# Altium PCB TDA7000.PcbDoc
Units mm, origin at the board's own origin, x right, y up, seen from the top; angles counter-clockwise.
Board outline 50 x 50.6 mm, 2 copper layers (Top Layer, Bottom Layer); 28 components, 21 nets, 79 pads, 4 vias.
Unrouted connection lines stored in the file: 11.
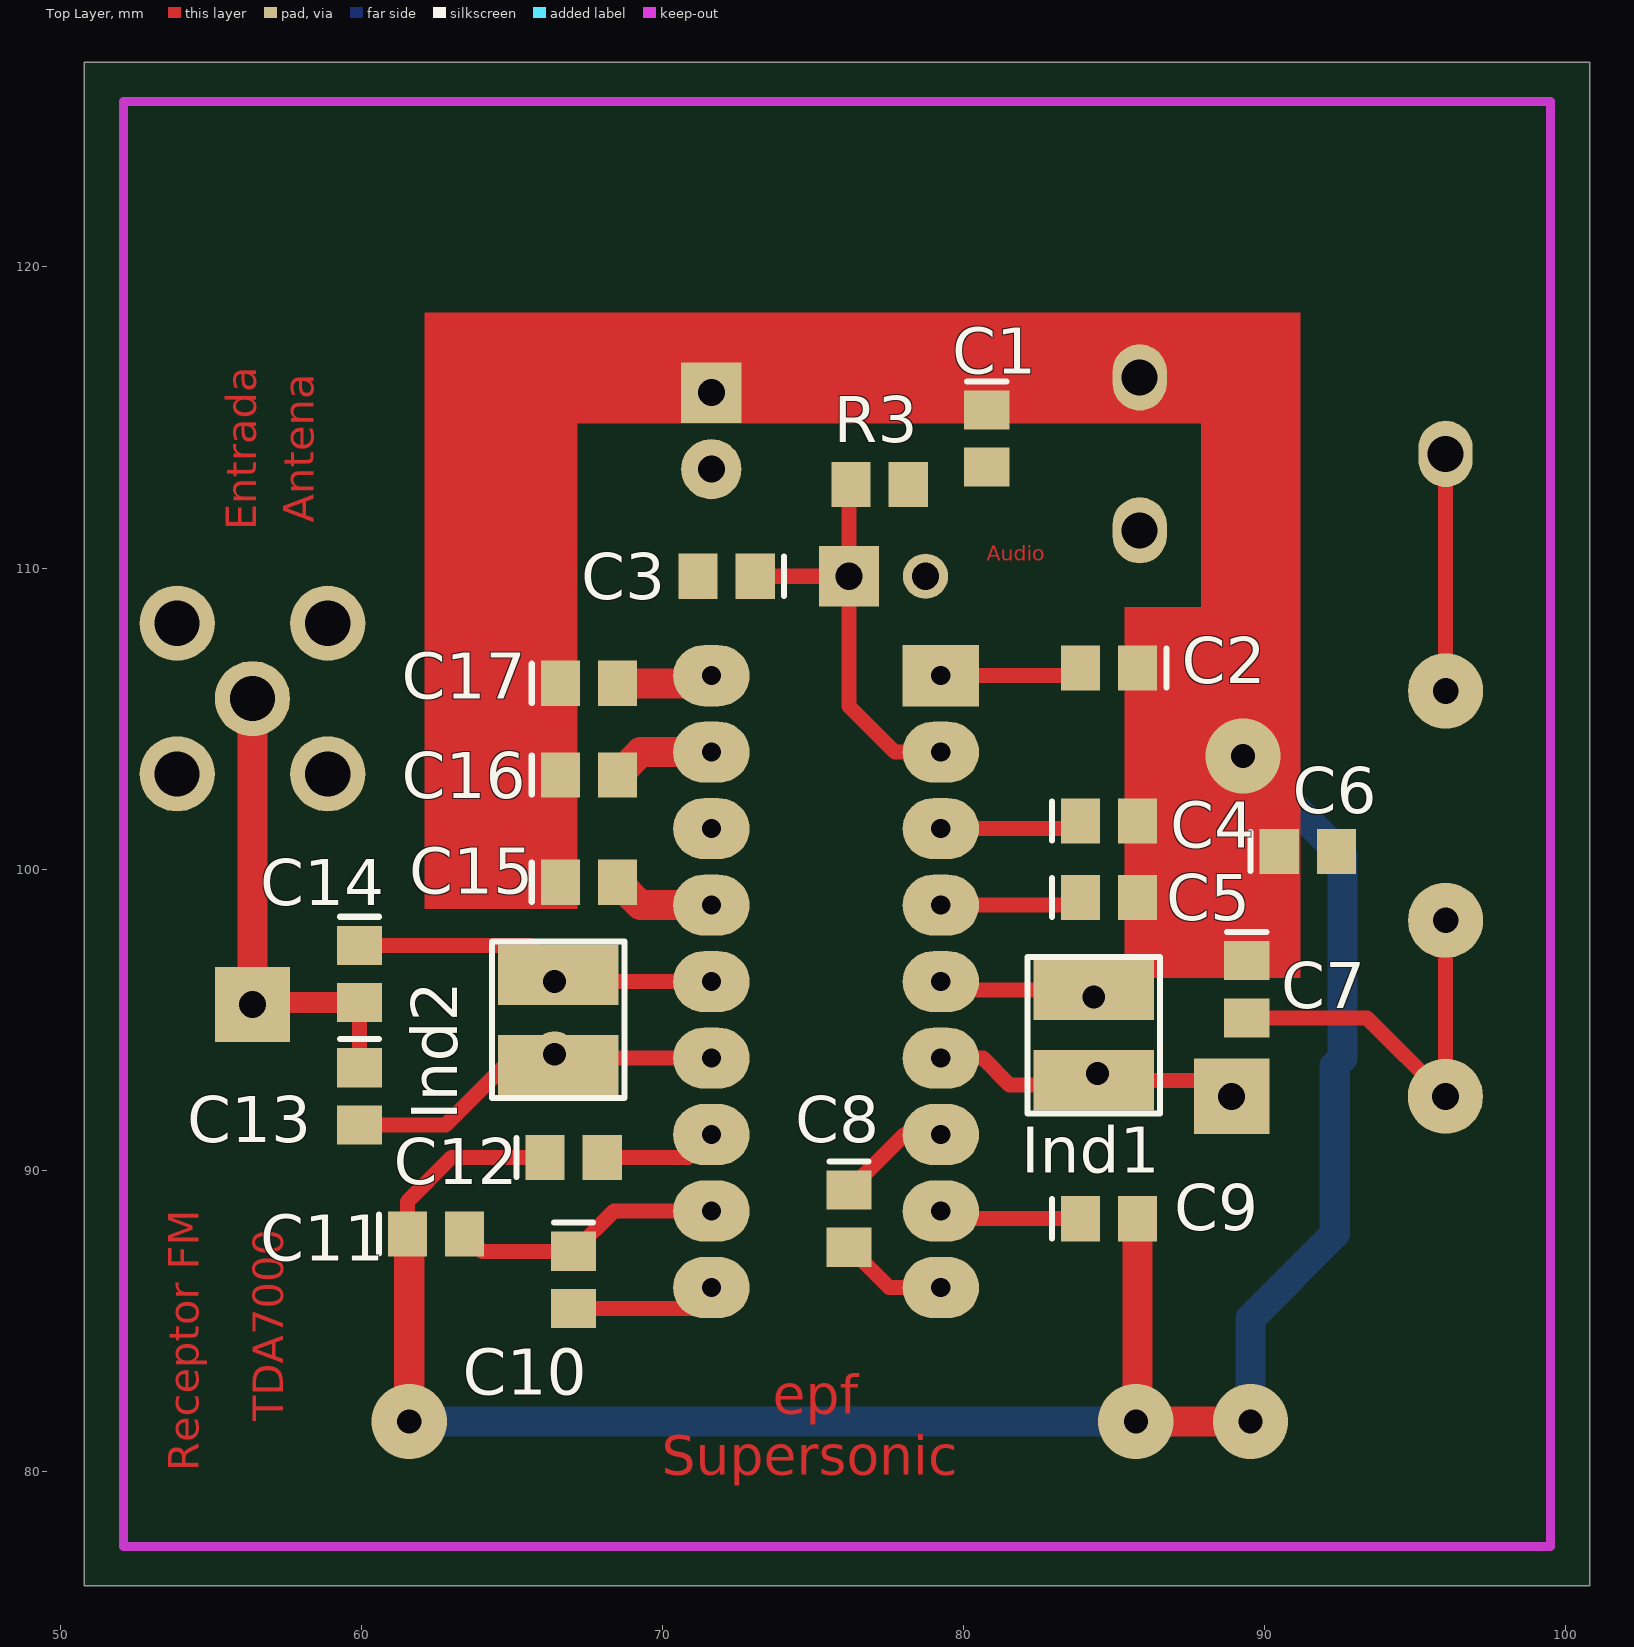
[diagram p0: Top Layer view]
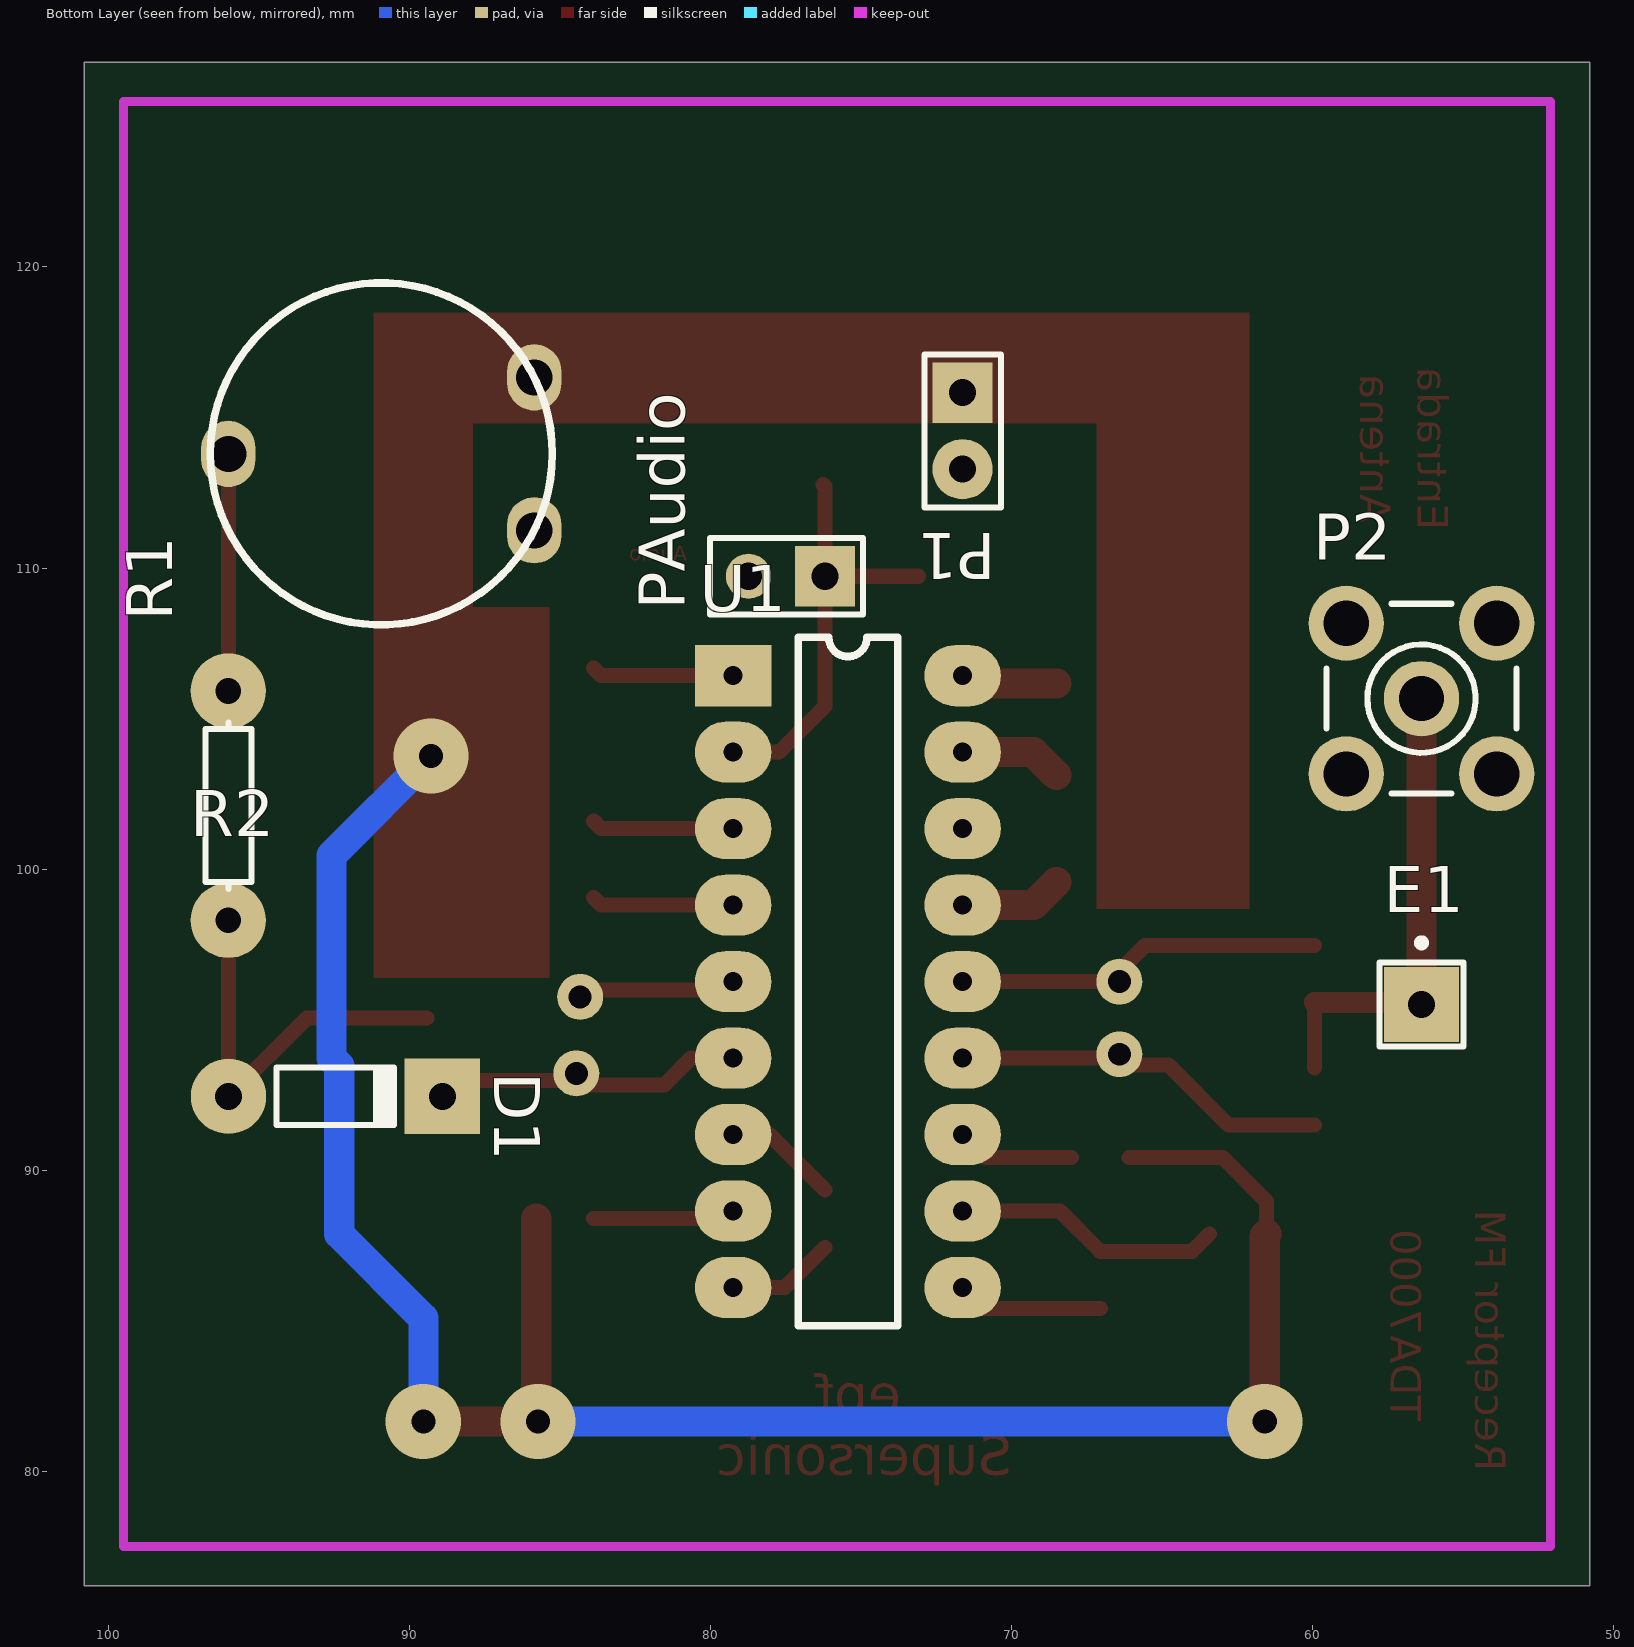
[diagram p1: Bottom Layer view, seen from below]

## Layer stack, top to bottom
Top Layer: signal copper 0.0356
Dielectric: dielectric 0.32, FR-4, Dk 4.8
Bottom Layer: signal copper 0.0356

## Board outline
50.8,76.2 100.8,76.2 100.8,126.8 50.8,126.8

## Design rules (kind name [scope] priority, off if disabled: settings)
Clearance [All] p1: gap=0.3
ComponentClearance [All] p1: gap=0.254 collisioncheckmode=3 verticalgap=0.254
PolygonConnect [All] p1: connectstyle=Direct reliefconductorwidth=0.254 reliefentries=4 polygonreliefangle="90 Angle"
RoomDefinition TDA7000 [InComponentClass('TDA7000')] p1: confinementstyle=ConfineIn formatcopy=TRUE lockcomponents=TRUE outline 45.339,73.406 104.013,73.406 104.013,127.635 45.339,127.635
RoutingVias [All] p1: holewidth=0.8 width=2 viastyle="Through Hole" minholewidth=0.711 minwidth=1.5 maxholewidth=1 maxwidth=3
SolderMaskExpansion [All] p1: expansion=0.102
TestPointUsage [All] p1: valid=0 allowmultiple=FALSE
Testpoint [All] p1: side=15 testpointundercomponent=TRUE minsize=1.016 maxsize=2.54 preferedsize=1.524 minholesize=0 maxholesize=1.016 preferedholesize=0.813 testpointgrid=0.025 style=1023 order=0-112345678
Width [All] p1: maxlimit=3 minlimit=0.3 preferedwidth=0.3
18 further rules are at their usual default settings.

## Components (designator, comment, footprint, x,y, rotation, side; value= is the part's Value field where it differs from the comment)
C1 "Cap Pol3" C0805 80.772,114.3 r270 top
C2 "Cap Pol3" C0805 84.836,106.68 r180 top
C3 "Cap Pol3" C0805 72.136,109.728 r180 top
C4 "Cap Pol3" C0805 84.836,101.6 r0 top
C5 "Cap Pol3" C0805 84.836,99.06 r0 top
C6 "Cap Pol3" C0805 91.44,100.584 r0 top
C7 "Cap Pol3" C0805 89.408,96.012 r270 top
C8 "Cap Pol3" C0805 76.2,88.392 r270 top
C9 "Cap Pol3" C0805 84.836,88.392 r0 top
C10 "Cap Pol3" C0805 67.056,86.36 r270 top
C11 "Cap Pol3" C0805 62.484,87.884 r0 top
C12 "Cap Pol3" C0805 67.056,90.424 r0 top
C13 "Cap Pol3" C0805 59.944,92.456 r270 top
C14 "Cap Pol3" C0805 59.944,96.52 r270 top
C15 "Cap Pol3" C0805 67.564,99.568 r0 top
C16 "Cap Pol3" C0805 67.564,103.124 r0 top
C17 "Cap Pol3" C0805 67.564,106.172 r0 top
D1 "Diode 1N914" DO-35 92.456,92.456 r180 bottom
E1 "Antenna" PIN1 56.388,95.504 r180 bottom
Ind1 "Ind2" IND_3MM 84.328,94.488 r90 top
Ind2 "Ind2" IND_3MM 66.548,94.996 r90 top
P1 "Header 2" HDR1X2#1 71.628,115.824 r270 bottom
P2 "SMB" SMB_V-RJ45 56.388,105.664 r180 bottom
PAudio "Header 2" HDR1X2#2 76.2,109.728 r0 bottom
R1 "Pot" POTENCIOMETRO 85.852,113.792 r90 bottom
R2 "Res1" AXIAL-0.3 96.012,102.108 r270 bottom
R3 "Res Semi" 2012[0805] 77.216,112.776 r180 top
U1 "TDA7000" TDA7000 79.248,106.426 r180 bottom

## Footprints (in the part's own frame and the unit in brackets; to place one, negate y for a bottom-side part, rotate by r counter-clockwise, add the part's x,y. Pads: shape width x height; smd on the part's side, far side on the other; paste and mask are expansions set on the pad)
2012[0805] [mm] "Chip Resistor; Body 2.0 x 1.3 mm (LxW typ)"
  rect 1.3x1.5 smd: 1(-0.95,0) 2(0.95,0)
AXIAL-0.3 [mm] "Resistor; 2 Leads"
  round 2.5 hole 0.85: 1(-3.81,0) 2(3.81,0)
  silkscreen extent -2.77,-0.76 2.77,0.76
C0805 [mm] "Chip Capacitor; Body 2.0 x 1.2 mm (LxW typ)"
  rect 1.3x1.5 smd: 1(-0.95,0) 2(0.95,0)
  silkscreen extent -1.9,-0.65 -1.9,0.65
DO-35 [mm] "Diode, Axial; Body 3.8 x 1.9 mm (LxDia. max), Lead Dia. 0.53 mm (max)"
  round 2.5 hole 0.9: 1(-3.55,0)
  rect 2.5x2.5 hole 0.9: 2(3.55,0)
  silkscreen extent -1.95,-0.95 2.05,0.95
HDR1X2#1 [mm] "Connector; Header; 2 Position"
  rect 2x2 hole 0.9: 1(0,0)
  round 2 hole 0.9: 2(2.54,0)
  silkscreen extent -1.27,-1.27 3.81,1.27
HDR1X2#2 [mm] "Connector; Header; 2 Position"
  rect 2x2 hole 0.9: 1(0,0)
  round 1.5 hole 0.9: 2(2.54,0)
  silkscreen extent -1.27,-1.27 3.81,1.27
IND_3MM [mm]
  rect 2x4 smd: 1(-1.5,0) 2(1.5,0)
  silkscreen extent -2.6,-2.2 2.6,2.2
PIN1 [mm] "Generic Antenna; 1 Lead"
  rect 2.5x2.5 hole 0.9: 1(0,0)
  silkscreen extent -1.4,-1.4 1.4,2.17
POTENCIOMETRO [mm]
  oval 2.2x1.8 hole 1.2: 1(-2.54,0) 2(2.54,0) 3(0,10.16)
  silkscreen extent -5.68,-0.6 5.68,10.76
SMB_V-RJ45 [mm] "Connector; SMB Straight"
  round 2.5 hole 1.5: 1(0,0) 2(-2.5,-2.5) 2(-2.5,2.5) 2(2.5,-2.5) 2(2.5,2.5)
  silkscreen extent -3.15,-3.15 3.15,3.15
TDA7000 [mil]
  rect 100x80 hole 25: 1(0,0)
  oval 100x80 hole 25: 2(0,-100) 3(0,-200) 4(0,-300) 5(0,-400) 6(0,-500) 7(0,-600) 8(0,-700) 9(0,-800) 10(300,-800) 11(300,-700) 12(300,-600) 13(300,-500) 14(300,-400) 15(300,-300) 16(300,-200) 17(300,-100) 18(300,0)
  silkscreen extent 85,-850 215,50

## Part data
C1 C2 C3 C4 C5 C6 C7 C8 C9 C10 C11 C12 C13 C14 C15 C16 C17: "Polarized Capacitor (Surface Mount)"
D1: "High Conductance Fast Diode"
E1: "Generic Antenna"
P1 PAudio: "Header, 2-Pin"
P2: "SMB Straight Connector"
R2: "Resistor"
R3: "Semiconductor Resistor"

## Free pads (board coordinates)
  round 1.524 hole 0.762: 0(66.421,96.266) 1(66.421,93.853) 2(84.328,95.758) 3(84.455,93.218)

## Via types
v1: diameter 2.5, hole 0.8, Top Layer to Bottom Layer, 4 vias

## Nets (pads, with @x,y where several pads share a name; then routed paths per layer and width w, separated by ;. In a path a pad name is that pad's centre, name@x,y a point inside that pad or via, vN(x,y) a via of type N, cw(c..) or ccw(c..) an arc to the next point about the centre after c; other vN are vias at no path point)
GND: C1.2 C3.2 C6.2 P1.2 P2.2 PAudio.2 R1.1 R3.1 U1.16
NetC2_2: C2.2 U1.1 | length 4.7
  Top Layer w0.5: U1.1 83.632,106.426 C2.2
NetC3_1: C3.1 PAudio.1 R3.2 U1.2 | length 14.2
  Top Layer w0.5: C3.1 PAudio.1 ; R3.2 76.2,112.71 76.2,105.41 77.724,103.886 U1.2
NetC4_1: C4.1 U1.3 | length 4.7
  Top Layer w0.5: U1.3 83.632,101.346 C4.1
NetC5_1: C5.1 U1.4 | length 4.7
  Top Layer w0.5: U1.4 83.632,98.806 C5.1
NetC7_2: C7.2 D1.1 R2.2 | length 13.5
  Top Layer w0.5: C7.2 93.4,95.062 D1.1 96.012,92.462 R2.2
NetC8_1: C8.1 U1.7 | length 3.8
  Top Layer w0.5: C8.1 78.044,91.186 U1.7
NetC8_2: C8.2 U1.9 | length 3.6
  Top Layer w0.5: C8.2 77.536,86.106 U1.9
NetC9_1: C9.1 U1.8 | length 4.7
  Top Layer w0.5: U1.8 79.502,88.392 C9.1
NetC10_1: C10.1 C11.2 U1.11 | length 9
  Top Layer w0.5: C11.2 64.008,87.31 C10.1 68.392,88.646 U1.11
NetC10_2: C10.2 U1.10 | length 4.9
  Top Layer w0.5: C10.2 70.932,85.41 U1.10
NetC12_2: C12.2 U1.12 | length 3.9
  Top Layer w0.5: C12.2 70.866,90.424 U1.12
NetC13_1: C13.1 C14.2 E1.1 P2.1 | length 15.9
  Top Layer w0.5: C13.1 C14.2
  Top Layer w0.7: E1.1 56.454,95.57 C14.2
  Top Layer w1: E1.1 P2.1
NetC13_2: C13.2 Ind2.1 pad.1 U1.13 | length 12.6
  Top Layer w0.5: C13.2 62.804,91.506 64.794,93.496 Ind2.1 66.778,93.726 U1.13
NetC14_1: C14.1 Ind2.2 pad.0 U1.14 | length 12.2
  Top Layer w0.5: C14.1 65.574,97.47 Ind2.2 66.778,96.266 U1.14
NetC15_2: C15.2 U1.15 | length 3.4
  Top Layer w1: C15.2 69.276,98.806 U1.15
NetC16_2: C16.2 U1.17 | length 3.4
  Top Layer w1: C16.2 69.276,103.886 U1.17
NetC17_2: C17.2 U1.18 | length 3.2
  Top Layer w1: C17.2 71.374,106.172 U1.18
NetD1_2: D1.2 Ind1.1 pad.3 U1.6 | length 10.3
  Top Layer w0.5: U1.6 80.645,93.726 81.534,92.837 84.177,92.837 Ind1.1 88.374,92.988 D1.2
NetR1_3: R1.3 R2.1 | length 7.9
  Top Layer w0.5: R2.1 R1.3
VCC: C1.1 C2.1 C4.2 C5.2 C6.1 C7.1 C9.2 C11.1 C12.1 C15.1 C16.1 C17.1 Ind1.2 P1.1 pad.2 R1.2 U1.5 | length 88.8
  Top Layer w0.5: C11.1 61.534,88.966 62.992,90.424 C12.1 ; U1.5 79.526,95.988 Ind1.2
  Top Layer w1: C11.1 61.595,87.823 v1(61.595,81.661) ; C9.2 85.786,81.722 v1(85.725,81.661) v1(89.535,81.661) ; R1.2 88.519,116.332 89.662,115.189 89.662,107.95 89.789,107.823
  Bottom Layer w1: v1(61.595,81.661) v1(85.725,81.661) ; v1(89.281,103.759) 92.583,100.457 92.583,93.726 92.329,93.472 92.329,87.884 89.535,85.09 v1(89.535,81.661)

## Keep-outs
Keep-Out Layer:
  lines w0.3: 52.1,77.5 99.5,77.5 99.5,125.5 52.1,125.5 52.1,77.5

## Other copper
Top Layer:
  rectangle net VCC: 87.884,108.712 91.186,118.491
  rectangle net VCC: 62.103,114.808 91.186,118.491
  rectangle net VCC: 62.103,98.679 67.183,118.364
  rectangle net VCC: 85.344,96.393 91.186,108.712
  text "Antena" at 58.42,111.506 h1 r90
  text "Entrada" at 56.515,111.252 h1 r90
  text "Audio" at 80.772,110.236 h0.5
  text "epf" at 73.66,81.915 h1.3
  text "TDA7000" at 57.404,81.661 h1 r90
  text "Receptor FM" at 54.61,80.01 h1 r90
  text "Supersonic" at 69.977,79.883 h1.3

## Silkscreen, mask and mechanical layers (free items; w line width, h text height)
Drill Drawing:
  text ".LEGEND" at 105.88,81.28 h1.52
  text "Drill Drawing." at 105.88,78.74 h1.52

## Dimensions
52.1,77.5 to 99.5,77.5 on Mechanical 1
52.1,77.5 to 52.1,125.5 on Mechanical 1